# Altium PCB PCB1.pcbdoc
Units mm, origin at the board's own origin, x right, y up, seen from the top; angles counter-clockwise.
Board outline 152.4 x 101.6 mm, 2 copper layers (Top Layer, Bottom Layer); 21 components, 19 nets, 172 pads, 0 vias.
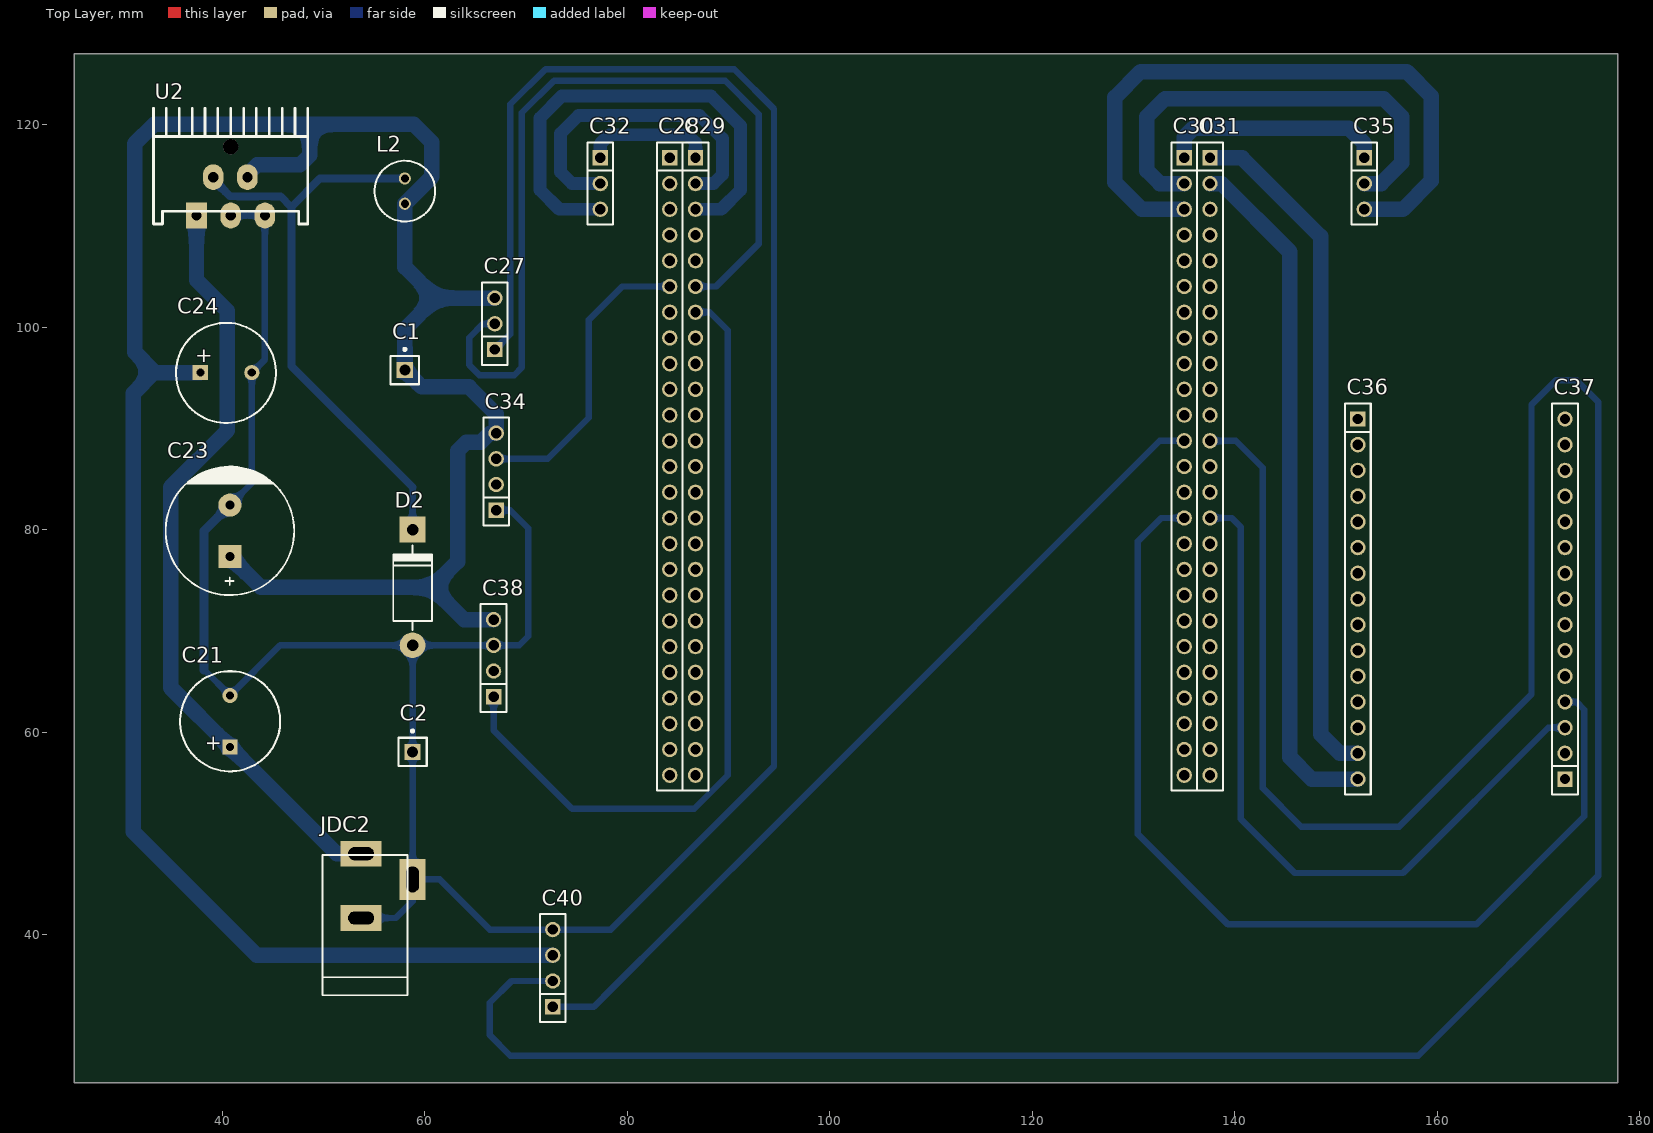
[diagram p0: Top Layer view]
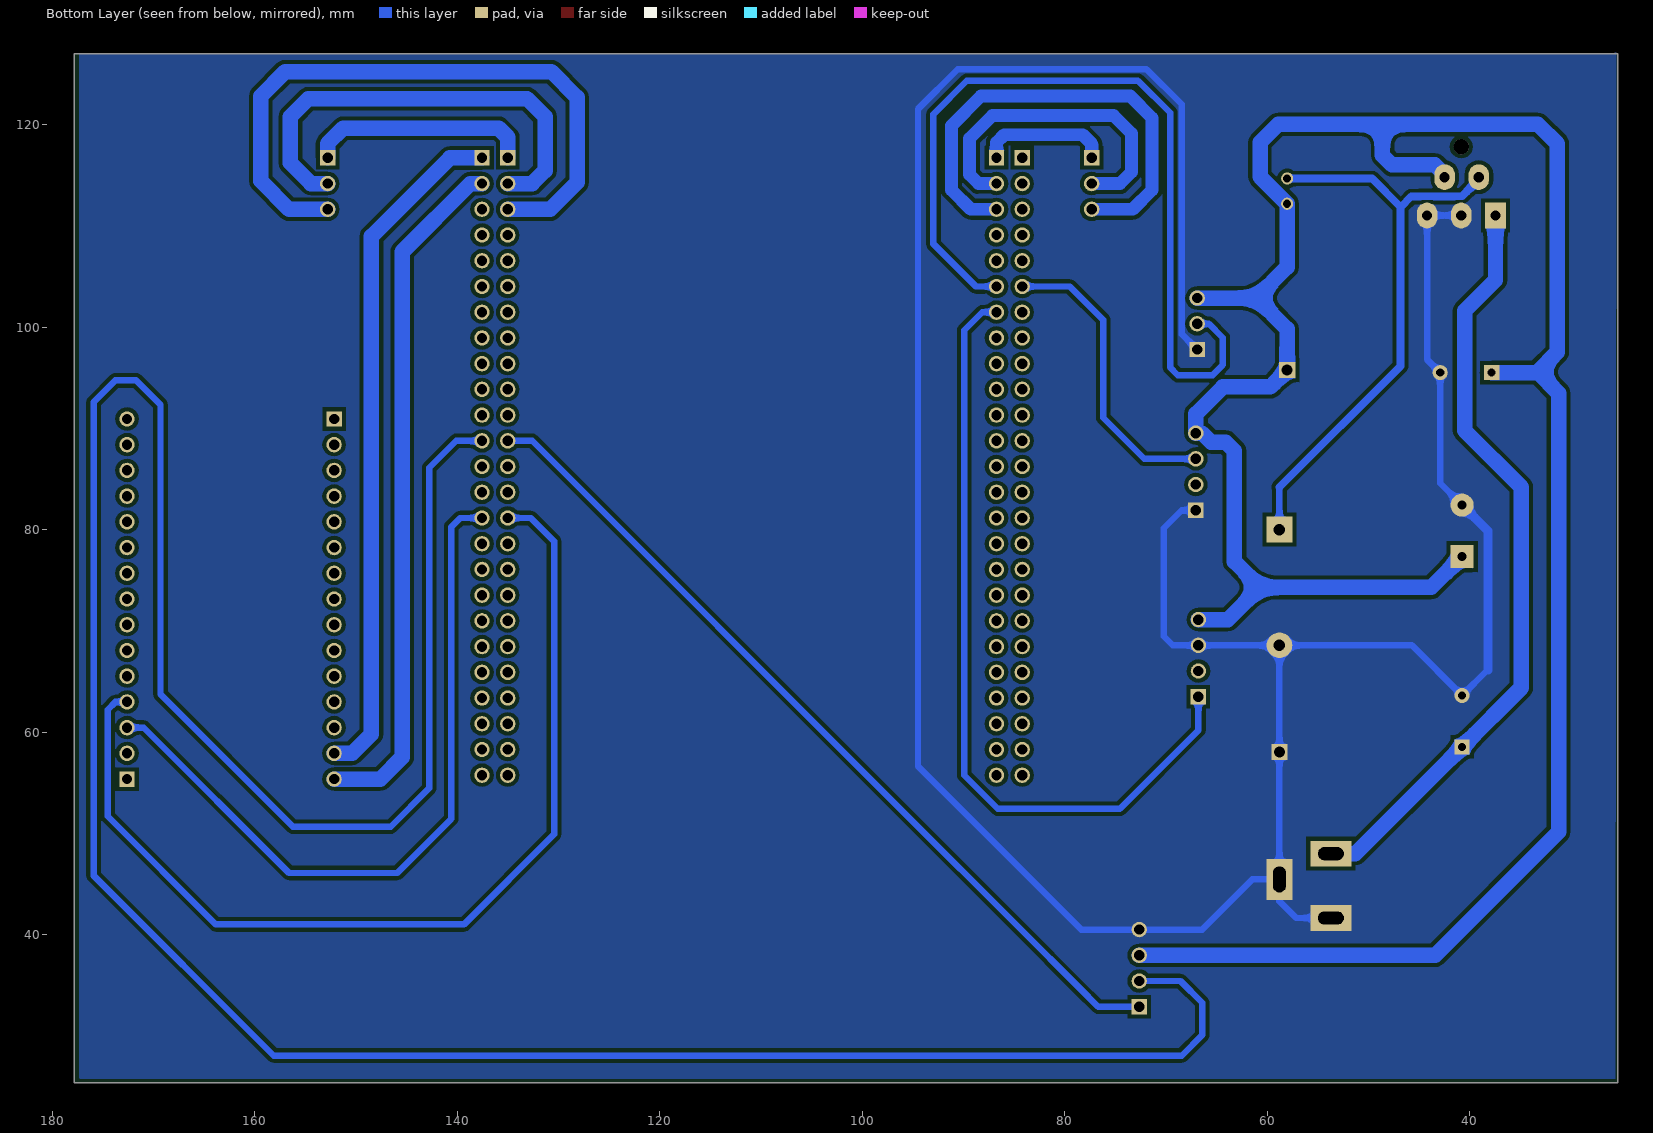
[diagram p1: Bottom Layer view, seen from below]
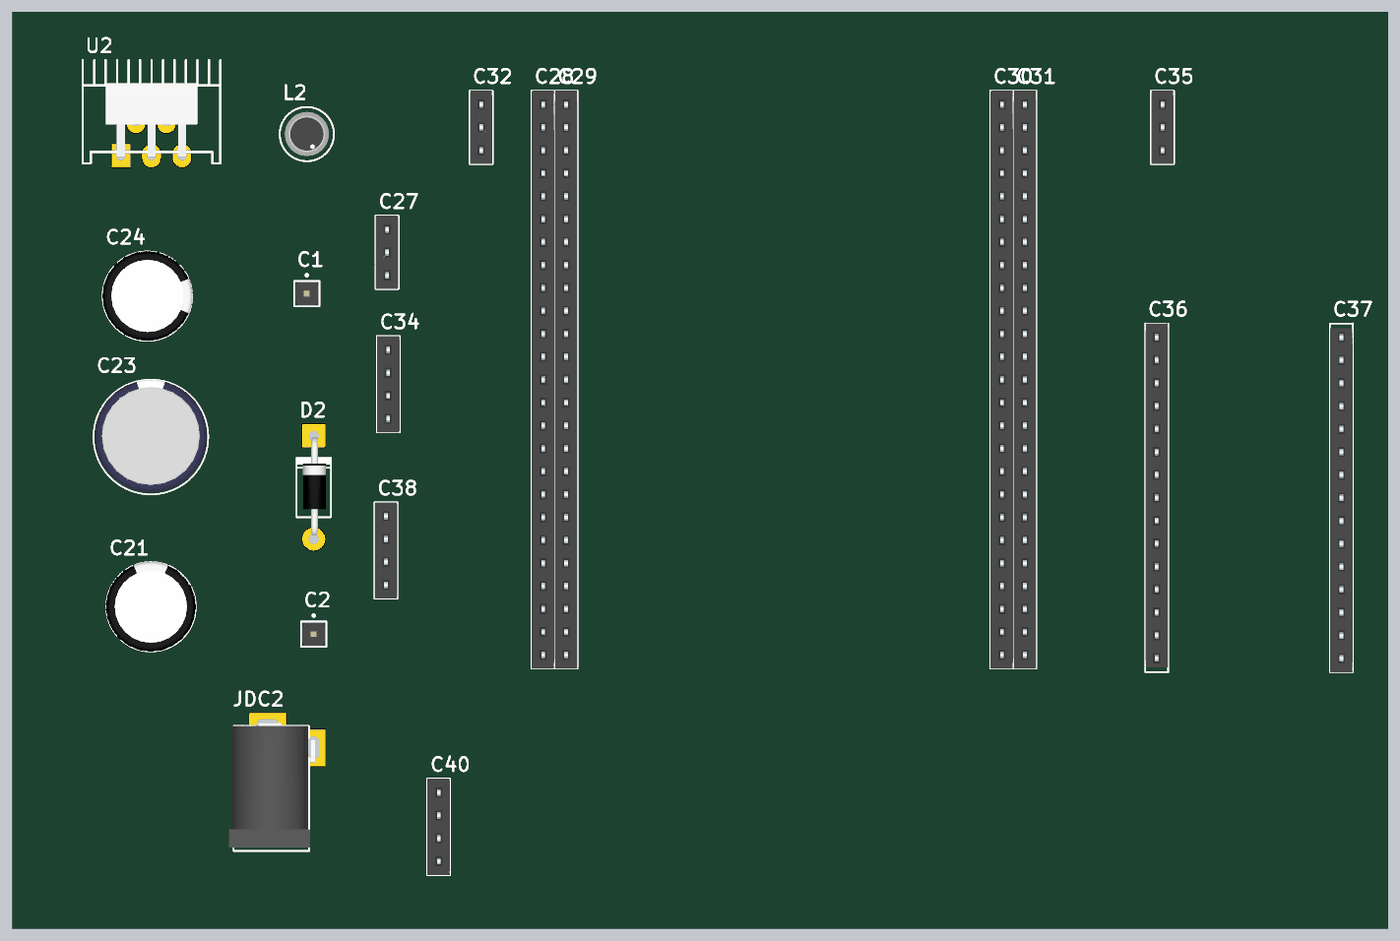
[diagram p2: 3D render of the assembled board from above, using the file's embedded part models]

## Layer stack, top to bottom
Top Solder: solder mask 0.0102, Solder Resist, Dk 3.5
Top Layer: signal copper 0.0356
Dielectric 1: dielectric 0.32, FR-4, Dk 4.8
Bottom Layer: signal copper 0.0356
Bottom Solder: solder mask 0.0102, Solder Resist, Dk 3.5

## Board outline
25.4,25.4 177.8,25.4 177.8,127 25.4,127

## Design rules (kind name [scope] priority, off if disabled: settings)
Clearance [All] p1: gap=0.381 ignorepadtopadclearanceinfootprint=FALSE
PolygonConnect [All] p1: connectstyle=Direct reliefconductorwidth=0.254 reliefentries=4 polygonreliefangle="90 Angle" airgapwidth=0.254
RoutingLayers [All] p1: top layer_v5=FALSE bottom layer_v5=TRUE
RoutingVias [All] p1: holewidth=0.711 width=1.27 viastyle="Through Hole" minholewidth=0.711 minwidth=1.27 maxholewidth=0.711 maxwidth=1.27
SolderMaskExpansion [All] p1: expansion=0.102
UnRoutedNet [All] p1: checkbadconnections=TRUE
Width [All] p1: maxlimit=1.524 minlimit=0.635 preferedwidth=0.635
28 further rules are at their usual default settings.

## Components (designator, comment, footprint, x,y, rotation, side; value= is the part's Value field where it differs from the comment)
C1 "JP1" JP1-D1T 58.039,95.758 r0 top
C2 "JP1" JP1-D1T 58.801,58.052 r0 top
C21 "pol 100uF" C10mm 40.767,61.087 r90 top
C23 "Cap Pol3" CP2/5 40.767,77.343 r90 top value=1000pF/35V
C24 "pol 10uF/15V" C10mm 40.386,95.504 r0 top
C27 "DHT22" JP3-C1T 66.929,97.79 r90 top
C28 "STM32_L1" JP25-C1T 84.201,116.713 r270 top
C29 "STM32_L2" JP25-C1T 86.741,116.713 r270 top
C30 "STM32_L3" JP25-C1T 135.001,116.713 r270 top
C31 "STM32_L4" JP25-C1T 137.541,116.713 r270 top
C32 "Power_L" JP3-C1T 77.343,116.713 r270 top
C34 "MQ-135" JP4-C1T 67.056,81.915 r90 top
C35 "Power_R" JP3-C1T 152.781,116.713 r270 top
C36 "8266_L" JP15-C1T 152.146,90.932 r270 top
C37 "8266_R" JP15-C1T 172.593,55.372 r90 top
C38 "MQ-136" JP4-C1T 66.802,63.5 r90 top
C40 "LCD" JP4-C1T 72.644,32.893 r90 top
D2 "FR307" D2A 58.801,80.01 r270 top value=1N4007
JDC2 "" DC-IN 56.261,44.831 r90 top value="Jac DC"
L2 "L-DIP-1" L-DIP-M-5.3 58.039,113.431 r270 top value="150 mH"
U2 "LM2576T-5.0" LM2576t 40.818,115.265 r0 top

## Footprints (in the part's own frame and the unit in brackets; to place one, negate y for a bottom-side part, rotate by r counter-clockwise, add the part's x,y. Pads: shape width x height; smd on the part's side, far side on the other; paste and mask are expansions set on the pad)
C10mm [mm]
  rect 1.5x1.5 hole 0.8: 1(-2.54,0)
  round 1.5 hole 0.8: 2(2.54,0)
  silkscreen extent -4.95,-4.96 4.93,4.92, body extent -5,-5 4.97,5, height 20.01
CP2/5 [mil] "Tu hoa 1000uF/25V,50V"
  rect 90x90 hole 35: 1(0,0)
  round 90 hole 35: 2(200,0)
  silkscreen extent -150,-250 350,250, body extent -142,-246 350,246, height 984
D2A [mil] "Diode 2A, W 150mil, L 450mil"
  round 100 hole 45: 1(450,0)
  rect 100x100 hole 45: 2(0,0)
  silkscreen extent 61,-75 391,75, body extent 5,-47 435,54, height 100
DC-IN [mil] "Jac DC input"
  rect 100x160 hole 50 slot 100 at 90 deg: 1(125,100) 2(-125,100)
  rect 160x100 hole 50 slot 100 at 0 deg: 3(25,-100)
  silkscreen extent -425,-80 120,250, body extent -410,-105 134,269, height 434
JP1-D1T [mm] "1pins, 1 row, straight, gold plating"
  rect 1.6x1.6 hole 1.1: 1(0,0)
  silkscreen extent -1.4,-1.4 1.4,2.17, body extent -1.27,-1.27 1.27,1.27, height 8.54
JP3-C1T [mm] "3 row, straight, gold plating"
  rect 1.52x1.52 hole 1.02: 1(0,0)
  round 1.52 hole 1.02: 2(2.54,0) 3(5.08,0)
  silkscreen extent -1.52,-1.27 6.6,1.27, body extent -1.52,-1.25 6.6,1.25, height 8.51
JP4-C1T [mm] "4 row, straight, gold plating"
  rect 1.52x1.52 hole 1.02: 1(0,0)
  round 1.52 hole 1.02: 2(2.54,0) 3(5.08,0) 4(7.62,0)
  silkscreen extent -1.52,-1.27 9.14,1.27, body extent -1.52,-1.25 9.14,1.25, height 8.51
JP15-C1T [mm] "15 row, straight, gold plating"
  rect 1.52x1.52 hole 1.02: 1(0,0)
  round 1.52 hole 1.02: 2(2.54,0) 3(5.08,0) 4(7.62,0) 5(10.16,0) 6(12.7,0) 7(15.24,0) 8(17.78,0) 9(20.32,0) 10(22.86,0) 11(25.4,0) 12(27.94,0) 13(30.48,0) 14(33.02,0) 15(35.56,0)
  silkscreen extent -1.52,-1.27 37.08,1.27, body extent -1.52,-1.25 36.58,1.25, height 8.51
JP25-C1T [mm] "25 row, straight, gold plating"
  rect 1.52x1.52 hole 1.02: 1(0,0)
  round 1.52 hole 1.02: 2(2.54,0) 3(5.08,0) 4(7.62,0) 5(10.16,0) 6(12.7,0) 7(15.24,0) 8(17.78,0) 9(20.32,0) 10(22.86,0) 11(25.4,0) 12(27.94,0) 13(30.48,0) 14(33.02,0) 15(35.56,0) 16(38.1,0) 17(40.64,0) 18(43.18,0) 19(45.72,0) 20(48.26,0) 21(50.8,0) 22(53.34,0) 23(55.88,0) 24(58.42,0) 25(60.96,0)
  silkscreen extent -1.52,-1.27 62.48,1.27, body extent -1.52,-1.25 62.48,1.25, height 8.51
L-DIP-M-5.3 [mm] "THT Inductor, 2-Leads, Body 5.3  mm"
  round 1.2 hole 0.8: 1(-1.25,0) 2(1.25,0)
  silkscreen extent -3,-3 3,3, body extent -2.44,-2.44 2.44,2.45, height 7.6
LM2576t [mil]
  rect 80x100 hole 40: 1(-132,-167.09)
  oval 80x100 hole 40: 2(-67,-18) 3(1,-167) 4(66,-18) 5(134,-167)
  round 59.06 hole 59.06: ""(1,100)
  silkscreen extent -299,-200 301,250, body extent -199,-175 201,150, height 859

## Part data
C1 C2: "WR-PHD 2.54 mm Angled Socket Header", Manufacturer="Würth Elektronik eiSos GmbH", partNo=613002143121, ComponentLink1 Description=Manufacturer, ComponentLink1URL=http://www.we-online.com, ComponentLink2 Description=Datasheet, ComponentLink2URL=http://katalog.we-online.de/em/datasheet/6130xx143121.pdf, Created by="Karrer Zheng", Created Date="29 March 2013", NoPins=02
C21 C24: library part "Cap Pol 12mm", "Polarized Capacitor (Axial)", LatestRevisionDate=17-Jul-2002, LatestRevisionNote="Re-released for DXP Platform.", PackageReference=POLAR0.8, Published=8-Jun-2000, Publisher="Altium Limited"
C23: "Polarized Capacitor (Surface Mount)", LatestRevisionDate=17-Jul-2002, LatestRevisionNote="Re-released for DXP Platform.", PackageReference=C0805, Publisher="Altium Limited"
C27 C32 C35: library part JP3, "WR-PHD 2.54 mm Angled Socket Header", Manufacturer="Würth Elektronik eiSos GmbH", partNo=613003143121, ComponentLink1 Description=Manufacturer, ComponentLink1URL=http://www.we-online.com, ComponentLink2 Description=Datasheet, ComponentLink2URL=http://katalog.we-online.de/em/datasheet/6130xx143121.pdf, Created by="Karrer Zheng", Created Date="29 March 2013", NoPins=03
C28 C29 C30 C31: library part JP25, "WR-PHD 2.54 mm Angled Socket Header", Manufacturer="Würth Elektronik eiSos GmbH", partNo=613025143121, ComponentLink1 Description=Manufacturer, ComponentLink1URL=http://www.we-online.com, ComponentLink2 Description=Datasheet, ComponentLink2URL=http://katalog.we-online.de/em/datasheet/6130xx143121.pdf, Created by="Karrer Zheng", Created Date="29 March 2013", NoPins=25
C34 C38 C40: library part JP4, "WR-PHD 2.54 mm Angled Socket Header", Manufacturer="Würth Elektronik eiSos GmbH", partNo=613004143121, ComponentLink1 Description=Manufacturer, ComponentLink1URL=http://www.we-online.com, ComponentLink2 Description=Datasheet, ComponentLink2URL=http://katalog.we-online.de/em/datasheet/6130xx143121.pdf, Created by="Karrer Zheng", Created Date="29 March 2013", NoPins=04
C36 C37: library part JP15, "WR-PHD 2.54 mm Angled Socket Header", Manufacturer="Würth Elektronik eiSos GmbH", partNo=613015143121, ComponentLink1 Description=Manufacturer, ComponentLink1URL=http://www.we-online.com, ComponentLink2 Description=Datasheet, ComponentLink2URL=http://katalog.we-online.de/em/datasheet/6130xx143121.pdf, Created by="Karrer Zheng", Created Date="29 March 2013", NoPins=15
D2: library part D1A, "Diode 1A"
JDC2: library part DCIN, "Jac DC input"
L2: "Inductor"
U2: "SIMPLE SWITCHER; 3A Step-Down Voltage Regulator", DigiKeyPartNumber=LM2576T-5.0-ND, Manufacturer="National Semiconductor", PackageTopMarking="NSUZXYTT*LM2576T*-5.0 P+", PowerWise=N, Code_JEDEC=TO-220-AB, ComponentLink1Description="LM2576 Datasheet", ComponentLink1URL=http://www.national.com/ds/LM/LM2576.pdf, ComponentLink2Description="LM2576 Web Page", ComponentLink2URL=http://www.national.com/pf/LM/LM2576.html, ComponentLink3Description="T05A Package Page", ComponentLink3URL=http://www.national.com/packaging/folders/t05a.html, CompType=Switcher, DatasheetVersion=Aug-2004, FirstPublished=4-Dec-2008, PackageDescription="TO-220, Molded, 5 Lead, Straight", PackageReference=T05A, PackageVersion="revJ, Jan-1992", PartNumber=LM2576T-5.0, PinCount=5, Publisher="Altium Limited", RoHS=O

## Nets (pads, with @x,y where several pads share a name; then routed paths per layer and width w, separated by ;. In a path a pad name is that pad's centre, name@x,y a point inside that pad or via, vN(x,y) a via of type N, cw(c..) or ccw(c..) an arc to the next point about the centre after c; other vN are vias at no path point)
5V: C1.1 C23.1 C24.1 C27.3 C34.4 C38.4 C40.3 L2.2 U2.4 | length 254.2
  Bottom Layer w1.524: C24.1 33.401,95.504 33.337,95.567 ; C23.1 43.815,74.295 60.706,74.295 ; U2.4 42.659,114.808 42.659,115.233 43.44,116.014 47.688,116.014 48.641,116.967 48.641,120.015 ; C38.4 63.881,71.12 60.706,74.295 ; C27.3 61.087,102.87 ; C40.3 43.434,37.973 31.242,50.165 31.242,93.472 33.337,95.567 ; 33.337,95.567 31.369,97.536 31.369,114.3 31.369,118.11 33.274,120.015 48.641,120.015 ; 48.641,120.015 58.928,120.015 60.706,118.237 60.706,114.848 L2.2 58.039,105.918 61.087,102.87 ; 60.706,74.295 63.246,76.835 63.246,87.783 64.109,88.646 65.562,88.646 66.451,89.535 C34.4 67.056,91.44 64.389,94.107 59.69,94.107 C1.1 58.039,99.822 61.087,102.87
C71: C29.1 C32.1 | length 13
  Bottom Layer w1.27: C32.1 77.343,118.11 78.232,118.999 85.979,118.999 86.741,118.237 C29.1
C72: C29.2 C32.2 | length 32.5
  Bottom Layer w1.27: C32.2 74.549,114.173 73.406,115.316 73.406,119.126 75.184,120.904 87.122,120.904 89.408,118.618 89.408,115.062 88.519,114.173 C29.2
C73: C29.3 C32.3 | length 47.4
  Bottom Layer w1.27: C32.3 73.279,111.633 71.374,113.538 71.374,120.65 73.533,122.809 88.265,122.809 91.186,119.888 91.186,113.538 89.281,111.633 C29.3
C81: C30.1 C35.1 | length 22.2
  Bottom Layer w1.524: C30.1 135.001,118.745 135.89,119.634 151.257,119.634 152.781,118.11 C35.1
C82: C30.2 C35.2 | length 45.3
  Bottom Layer w1.524: C30.2 132.588,114.173 131.318,115.443 131.318,120.777 133.096,122.555 154.686,122.555 156.464,120.777 156.464,116.205 154.432,114.173 C35.2
C83: C30.3 C35.3 | length 65.8
  Bottom Layer w1.524: C30.3 130.81,111.633 128.143,114.3 128.143,122.682 130.683,125.222 156.972,125.222 159.385,122.809 159.385,114.427 156.591,111.633 C35.3
C91: C31.1 C36.14 | length 67.8
  Bottom Layer w1.524: C31.1 140.716,116.713 148.463,108.966 148.463,59.817 150.368,57.912 C36.14
C92: C31.2 C36.15 | length 68.2
  Bottom Layer w1.524: C31.2 138.684,114.173 145.415,107.442 145.415,57.531 147.574,55.372 C36.15
GND: C2.1 C21.2 C23.2 C24.2 C27.1 C34.1 C38.3 C40.4 D2.1 JDC2.2 JDC2.3 U2.3 U2.5 | length 295.3
  Bottom Layer w0.635: 38.227,66.167 C21.2 45.72,68.58 D2.1 ; C23.2 42.926,84.582 C24.2 44.221,96.799 U2.5 U2.3 ; JDC2.2 57.15,41.656 58.801,43.307 JDC2.3 ; D2.1@58.674,68.453 D2.1 ; C27.1 68.453,99.314 68.453,121.996 71.933,125.476 90.551,125.476 94.488,121.539 94.488,56.642 78.359,40.513 C40.4 66.421,40.513 61.468,45.466 JDC2.3 ; C34.1 68.453,81.915 70.231,80.137 70.231,69.469 69.342,68.58 C38.3 D2.1 ; JDC2.3 C2.1 D2.1
  Bottom Layer w0.889: 38.227,66.167 38.227,79.883 C23.2
NetC21_1: C21.1 JDC2.1 U2.1 | length 75.8
  Bottom Layer w1.524: U2.1 37.465,104.648 40.513,101.6 40.513,89.789 34.925,84.201 34.925,64.389 C21.1 51.308,48.006 JDC2.1
NetD2_2: D2.2 L2.1 U2.2 | length 59.3
  Bottom Layer w0.635: U2.2@38.9,114.808 U2.2 ; 46.825,111.849 46.838,111.836 ; L2.1 L2.1@58.166,114.808 ; D2.2@58.42,80.01 D2.2@58.801,80.391 ; D2.2 D2.2@58.801,80.391 ; 58.801,84.201 D2.2@58.801,80.391
  Bottom Layer w0.762: U2.2@38.9,114.808 40.78,112.928 41.527,112.928 41.552,112.903 43.512,112.903 43.538,112.928 44.905,112.928 44.931,112.903 45.771,112.903 46.825,111.849 49.657,114.681 L2.1 ; 46.838,111.836 46.838,96.164 58.801,84.201
PA0: C27.2 C29.6 | length 83.7
  Bottom Layer w0.635: C27.2 65.761,100.33 64.389,98.958 64.389,96.266 65.405,95.25 68.834,95.25 69.596,96.012 69.596,121.158 72.771,124.333 89.662,124.333 92.964,121.031 92.964,108.204 88.773,104.013 C29.6
PA1: C28.6 C34.3 | length 29.8
  Bottom Layer w0.635: C34.3 72.136,86.995 76.2,91.059 76.2,100.711 79.502,104.013 C28.6
PA2: C29.7 C38.1 | length 78.8
  Bottom Layer w0.635: C38.1 66.802,60.198 74.549,52.451 86.614,52.451 89.916,55.753 89.916,99.695 88.138,101.473 C29.7
PB6: C30.12 C40.1 | length 85.5
  Bottom Layer w0.635: C40.1 76.708,32.893 78.549,34.734 84.455,40.64 96.012,52.197 132.588,88.773 C30.12
PB7: C31.12 C40.2 | length 283.3
  Bottom Layer w0.635: C40.2 68.58,35.433 66.421,33.274 66.421,30.099 68.453,28.067 158.115,28.067 175.895,45.847 175.895,92.583 173.736,94.742 171.704,94.742 169.291,92.329 169.291,63.754 156.21,50.673 146.558,50.673 142.748,54.483 142.748,86.106 140.081,88.773 C31.12
PD5: C30.15 C37.4 | length 99.4
  Bottom Layer w0.635: C30.15 132.715,81.153 130.429,78.867 130.429,49.911 139.319,41.021 163.83,41.021 174.498,51.689 174.498,62.23 173.736,62.992 C37.4
PD6: C31.15 C37.3 | length 72.4
  Bottom Layer w0.635: C31.15 139.7,81.153 140.589,80.264 140.589,51.435 145.923,46.101 156.591,46.101 170.942,60.452 C37.3
pads on no net: C28.1 C28.2 C28.3 C28.4 C28.5 C28.7 C28.8 C28.9 C28.10 C28.11 C28.12 C28.13 C28.14 C28.15 C28.16 C28.17 C28.18 C28.19 C28.20 C28.21 C28.22 C28.23 C28.24 C28.25 C29.4 C29.5 C29.8 C29.9 C29.10 C29.11 C29.12 C29.13 C29.14 C29.15 C29.16 C29.17 C29.18 C29.19 C29.20 C29.21 C29.22 C29.23 C29.24 C29.25 C30.4 C30.5 C30.6 C30.7 C30.8 C30.9 C30.10 C30.11 C30.13 C30.14 C30.16 C30.17 C30.18 C30.19 C30.20 C30.21 C30.22 C30.23 C30.24 C30.25 C31.3 C31.4 C31.5 C31.6 C31.7 C31.8 C31.9 C31.10 C31.11 C31.13 C31.14 C31.16 C31.17 C31.18 C31.19 C31.20 C31.21 C31.22 C31.23 C31.24 C31.25 C34.2 C36.1 C36.2 C36.3 C36.4 C36.5 C36.6 C36.7 C36.8 C36.9 C36.10 C36.11 C36.12 C36.13 C37.1 C37.2 C37.5 C37.6 C37.7 C37.8 C37.9 C37.10 C37.11 C37.12 C37.13 C37.14 C37.15 C38.2 U2.

## Polygon pours and split planes (outlines as drawn)
GND on Bottom Layer "Bottom Layer-GND" (solid, pour order 14): 25.527,127.254 25.781,127 177.292,127 177.292,25.908 177.419,25.781 25.654,25.781
no net on Bottom Layer "Bottom Layer-No Net" (solid, pour order 6): 29.464,127.127
no net on Bottom Layer "Bottom Layer-No Net 1" (solid, pour order 0): 27.178,126.873

## Text inside footprints (layer, text, board x,y; h text height)
C21: Top Overlay "+" at 39.751,58.039 h1.52 r90
C24: Top Overlay "+" at 37.338,96.52 h1.52